# EAGLE board Middle Board - Nats (EAGLE 9.2.2)
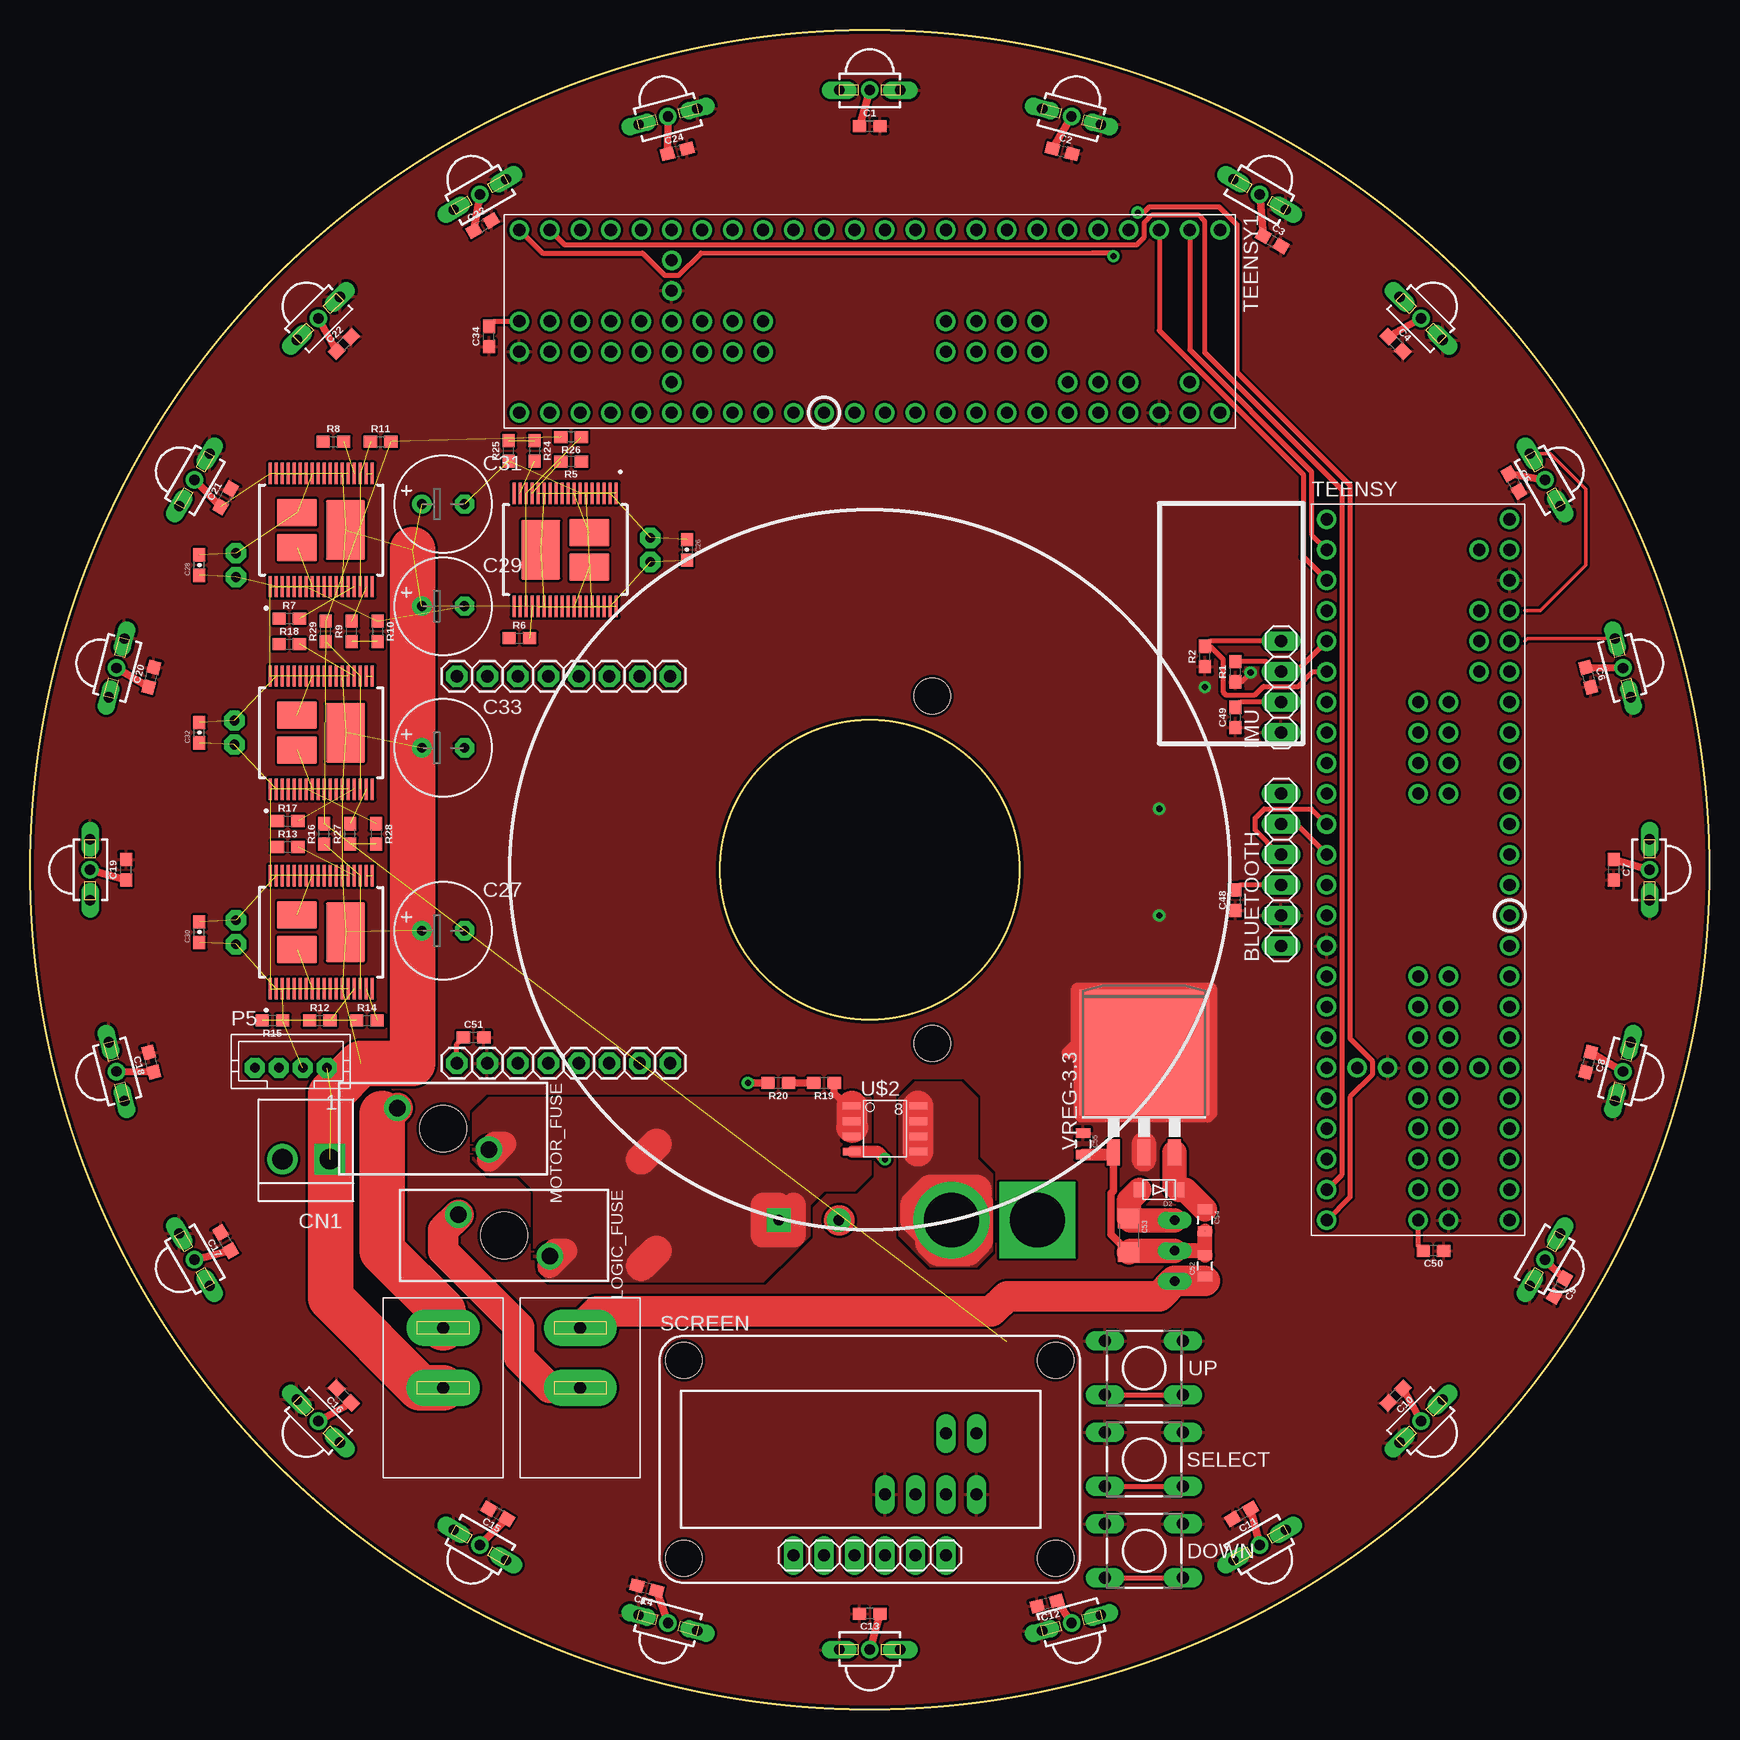
[diagram p0: board, top side]
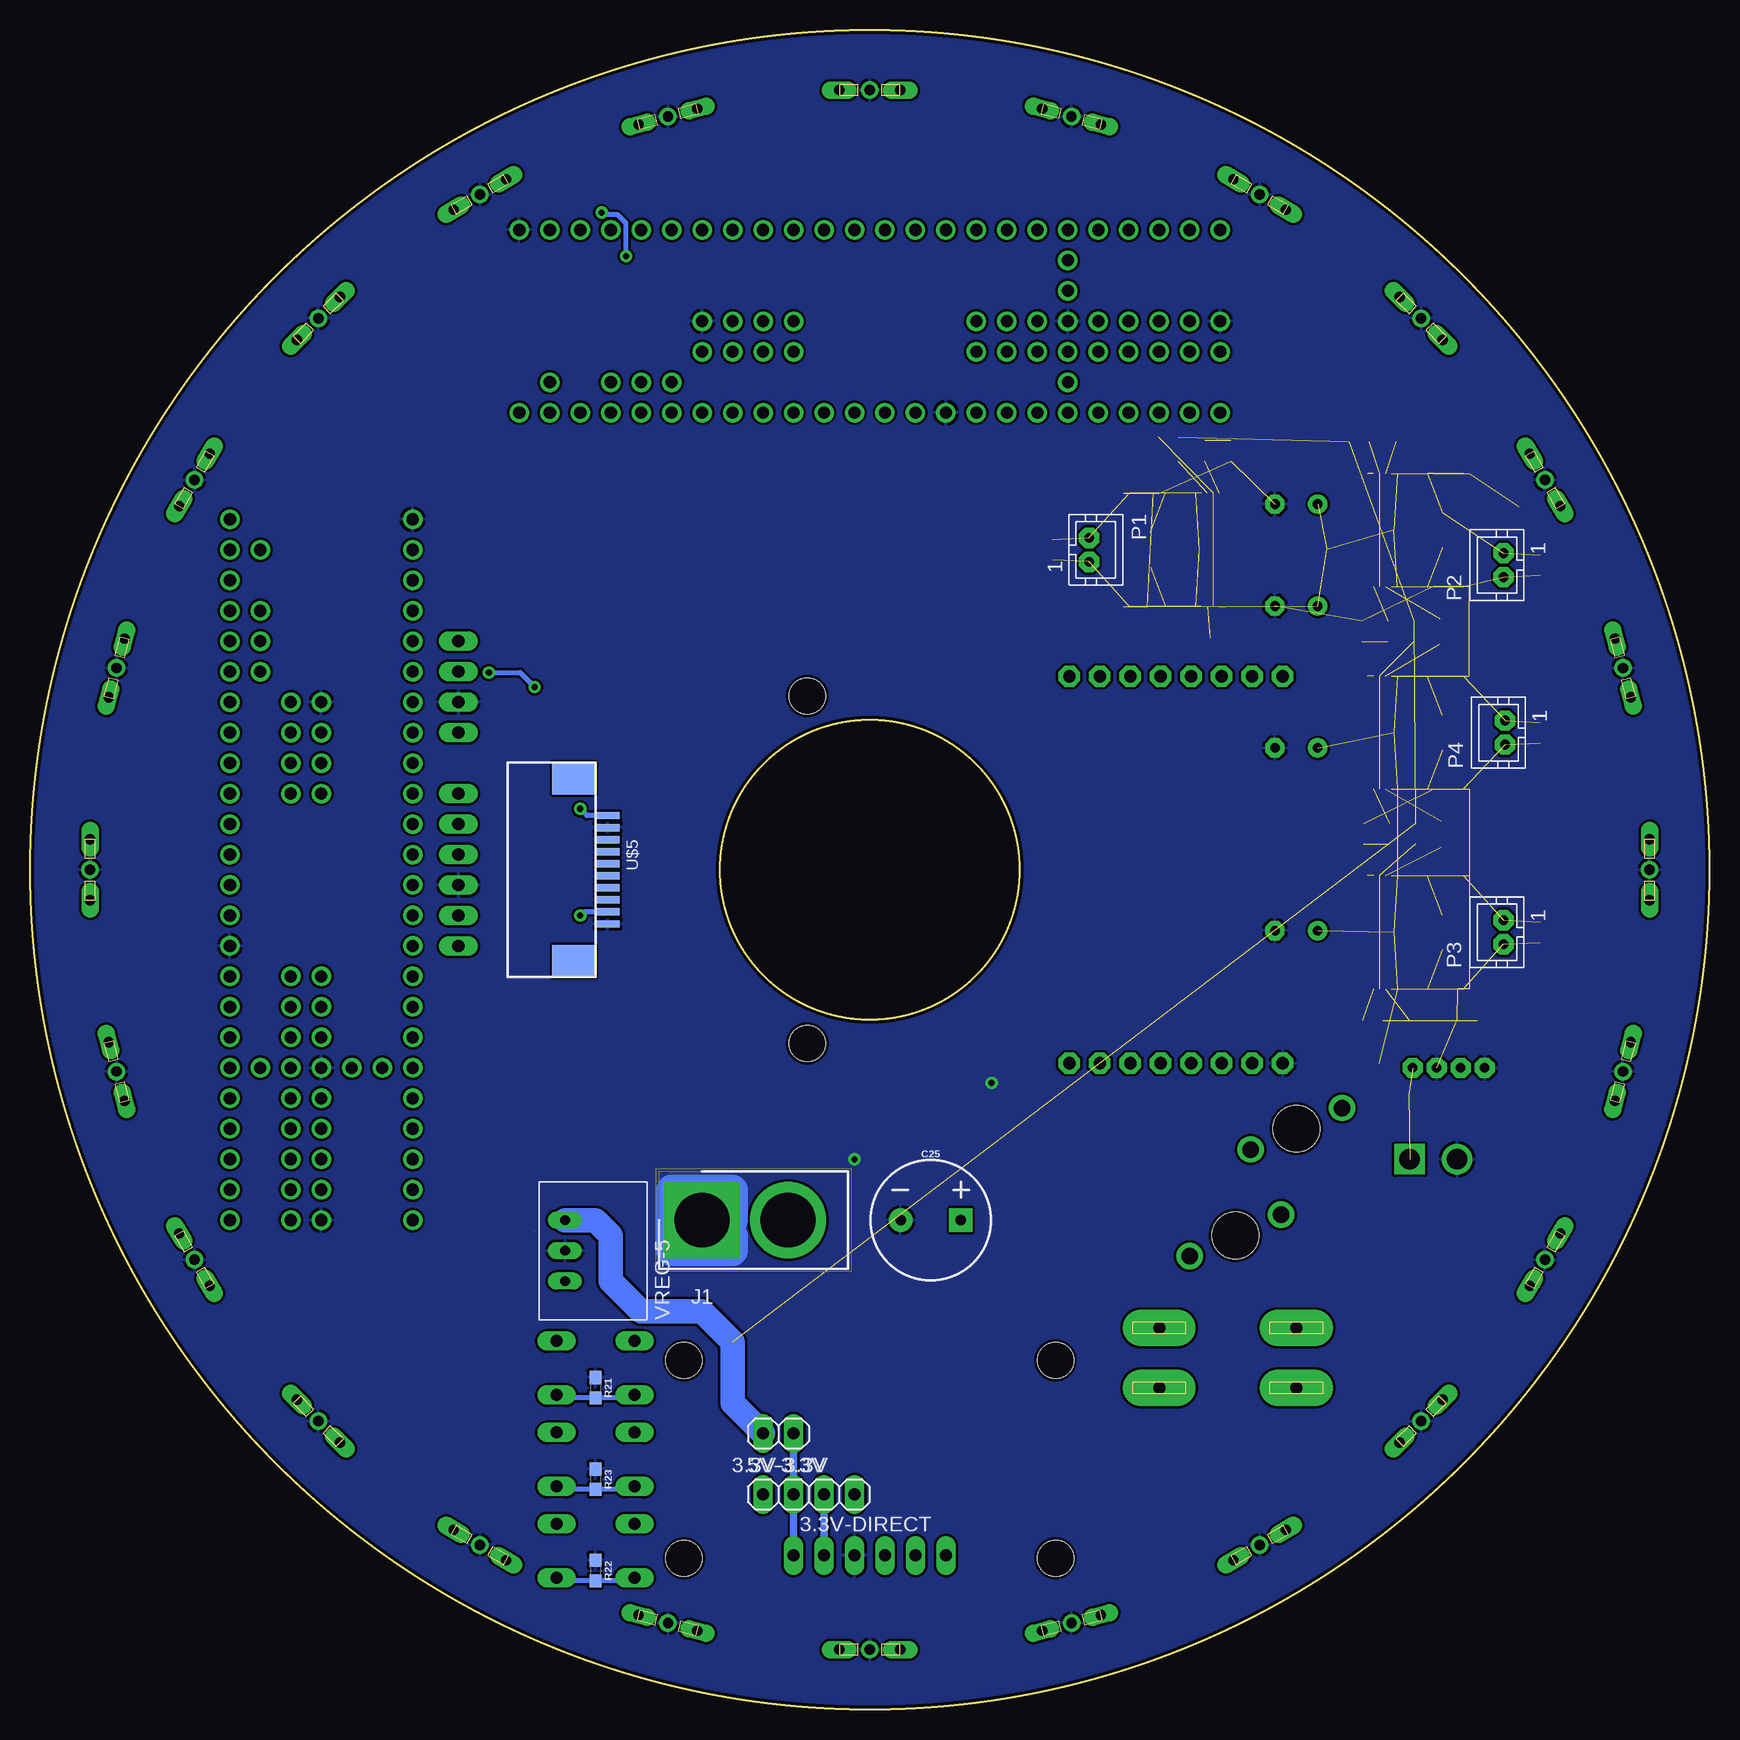
[diagram p1: board, bottom side, seen from below]

Size 140 x 140 mm. Coordinates in mm from the lower left corner, seen from the top.
Outline: circle at 70,70 radius 70
Outline: circle at 70,70 radius 12.5
Copper layers (1*16): Top 0.035mm / dielectric 1.5mm / Bottom 0.035mm
Design rules "SparkFun": minimum track width 8mil, minimum drill 20mil, track to track 8mil, track to pad 8mil, pad to pad 8mil, via to via 8mil, smd to smd 8mil, copper to edge 10mil, drill to drill 8mil, minimum pad ring 12mil, minimum via ring 10mil, stop-mask expansion 4mil, vias tented up to drill 25mil, thermal gap 10mil
Net classes: 0 default: width 0.305 mm, clearance 0.152 mm
Holes 3 mm at 75.21,55.52 75.21,84.48 54.51,29.11 85.49,29.11 85.49,12.6 54.51,12.6

## Footprints (pad centres in the part's own frame; a part is rotated, then mirrored left to right if it is on the bottom)
1X02 = drill 1.016 long: 1 -1.27,0; 2 1.27,0
1X06 = drill 1.016 long: 1 -6.35,0; 2 -3.81,0; 3 -1.27,0; 4 1.27,0; 5 3.81,0; 6 6.35,0
0603 = smd 1.1 x 1: 1 -0.85,0; 2 0.85,0
CPOL-RADIAL-5MM-10MM = drill 0.9 pad 1.93 square: + 2.5,0 | drill 0.9 pad 1.93: - -2.5,0
SPARKFUN-CAPACITORS_0603-CAP = smd 1.1 x 1: 1 -0.85,0; 2 0.85,0
E3,5-8 = drill 0.813 pad 1.6: + -1.778,0 | drill 0.813 pad 1.6 octagon: - 1.778,0
SPARKFUN-CAPACITORS_0805 = smd 0.8 x 1.2: 1 -0.9,0; 2 0.9,0
SPARKFUN-CAPACITORS_1206 = smd 1.6 x 1.8: 1 -1.4,0; 2 1.4,0
B2P-VH = drill 1.7 square: 1 -1.98,0 | drill 1.7: 2 1.98,0
ADAFRUIT_SOD-123FL = smd 0.91 x 1.22: A 1.637,0; C -1.637,0
DTS-6 = drill 1 long: 1 -3.25,2.25; 2 3.25,2.25; 3 -3.25,-2.25; 4 3.25,-2.25
1X04 = drill 1.016 long: 1 -3.81,0; 2 -1.27,0; 3 1.27,0; 4 3.81,0
SHDR2W320P716_1X2_1574X813X158 = drill 4.572 pad 6.35 square: 1 0,0 | drill 4.572 pad 6.35: 2 7.163,0
SL-1538 = drill 1.37 pad 2.184: P$1 1.73,3.81; P$2 -1.73,-3.81 | hole 3.88: 0,0
SOP50P1030X247-36N = smd 1.79 x 0.35: 1 -4.715,4.25; 2 -4.715,3.75; 3 -4.715,3.25; 4 -4.715,2.75; 5 -4.715,2.25; 6 -4.715,1.75; 7 -4.715,1.25; 8 -4.715,0.75; 9 -4.715,0.25; 10 -4.715,-0.25; 11 -4.715,-0.75; 12 -4.715,-1.25; 13 -4.715,-1.75; 14 -4.715,-2.25; 15 -4.715,-2.75; 16 -4.715,-3.25; 17 -4.715,-3.75; 18 -4.715,-4.25; 19 4.715,-4.25; 20 4.715,-3.75; 21 4.715,-3.25; 22 4.715,-2.75; 23 4.715,-2.25; 24 4.715,-1.75; 25 4.715,-1.25; 26 4.715,-0.75; 27 4.715,-0.25; 28 4.715,0.25; 29 4.715,0.75; 30 4.715,1.25; 31 4.715,1.75; 32 4.715,2.25; 33 4.715,2.75; 34 4.715,3.25; 35 4.715,3.75; 36 4.715,4.25 | smd 4.95 x 3.25: SLUG1 0,-2.025 | smd 2.286 x 3.302: SLUG2 -1.45,2.025; SLUG3 1.45,2.025
OPENMV3 = drill 1.016 pad 1.778 octagon: 11 1.651,19.304; 12 1.651,16.764; 13 1.651,14.224; 14 1.651,11.684; 15 1.651,9.144; 16 1.651,6.604; 17 1.651,4.064; 18 1.651,1.524; 21 33.909,19.304; 22 33.909,16.764; 23 33.909,14.224; 24 33.909,11.684; 25 33.909,9.144; 26 33.909,6.604; 27 33.909,4.064; 28 33.909,1.524
JST-PH2 = drill 0.813 pad 1.676 octagon: 1 1,0; 2 -1,0
JST-PH4 = drill 0.813 pad 1.676 octagon: 1 3,0; 2 1,0; 3 -1,0; 4 -3,0
TEENSY-3.5 = drill 1.016: 0 -7.62,26.67; 1 -7.62,24.13; 2 -7.62,21.59; 3 -7.62,19.05; 3.3V -7.62,-6.35; 3.3V-1 7.62,24.13; 3.3V-2 2.54,-29.21; 3.3V-3 -2.54,-16.51; 4 -7.62,16.51; 5 -7.62,13.97; 6 -7.62,11.43; 7 -7.62,8.89; 8 -7.62,6.35; 9 -7.62,3.81; 10 -7.62,1.27; 11 -7.62,-1.27; 12 -7.62,-3.81; 13 7.62,-3.81; 14 7.62,-1.27; 15 7.62,1.27; 16 7.62,3.81; 17 7.62,6.35; 18 7.62,8.89; 19 7.62,11.43; 20 7.62,13.97; 21 7.62,16.51; 22 7.62,19.05; 23 7.62,21.59; 24 -7.62,-8.89; 25 -7.62,-11.43; 26 -7.62,-13.97; 27 -7.62,-16.51; 28 -7.62,-19.05; 29 -7.62,-21.59; 30 -7.62,-24.13; 31 -7.62,-26.67; 32 -7.62,-29.21; 33 7.62,-29.21; 34 7.62,-26.67; 35 7.62,-24.13; 36 7.62,-21.59; 37 7.62,-19.05; 38 7.62,-16.51; 39 7.62,-13.97; 40 0,-8.89; 41 0,-11.43; 42 0,-13.97; 43 0,-19.05; 44 0,-21.59; 45 0,-24.13; 46 0,-26.67; 47 2.54,-26.67; 48 2.54,-24.13; 49 2.54,-21.59; 50 2.54,-19.05; 51 2.54,-13.97; 52 2.54,-11.43; 53 2.54,-8.89; 54 2.54,6.35; 55 2.54,8.89; 56 2.54,11.43; 57 2.54,13.97; A10 5.08,19.05; A11 5.08,16.51; AGND 7.62,26.67; AREF 5.08,21.59; DA0 7.62,-11.43; DA1 7.62,-8.89; DC 0,8.89; DD 0,6.35; DE 0,11.43; GND -7.62,29.21; GND-1 7.62,-6.35; GND-2 0,-29.21; GND-3 0,-16.51; GND-4 0,13.97; PRGRM 2.54,-16.51; RESET 5.08,-16.51; VBAT -5.08,-16.51; VIN 7.62,29.21; VUSB 5.08,26.67
MINICAST = drill 0.85 long: 1 0,2.54; 3 0,-2.54 | drill 0.85: 2 0,0
SWITCH = drill 1 pad 3.048 long: P$1 0,0; P$2 0,-5
SO-8 = smd 1.524 x 0.61: 1 -2.743,1.905; 2 -2.743,0.635; 3 -2.743,-0.635; 4 -2.743,-1.905; 5 2.743,-1.905; 6 2.743,-0.635; 7 2.743,0.635; 8 2.743,1.905
FPC10 = smd 0.61 x 2.007: 1 -4.515,1.003; 2 -3.512,1.003; 3 -2.508,1.003; 4 -1.505,1.003; 5 -0.502,1.003; 6 0.502,1.003; 7 1.505,1.003; 8 2.508,1.003; 9 3.512,1.003; 10 4.515,1.003 | smd 2.667 x 3.607: N/C-1 -7.62,-1.803; N/C-2 7.62,-1.803
LINEAR_TO263-3 = smd 1.067 x 2.159: 1 -2.54,-5.791; 2 0,-5.791; 3 2.54,-5.791 | smd 10.8 x 10.41: TAB 0,2.54
V78-2000-SWITCHING-REGULATOR_V78-2000 = drill 0.8 long: 1 -2.54,0; 2 0,0; 3 2.54,0

## Placement (x,y rotation side)
3.3V-3.3V  [1X02]  77.62,17.93 0 bottom
3.3V-DIRECT  [1X02]  72.54,17.93 180 bottom
5V-3.3V  [1X02]  77.62,23.01 0 bottom
BLUETOOTH  [1X06]  104.29,70 90 top
C1  0.1uF  [0603]  70,132 0 top
C2  0.1uF  [0603]  86.05,129.89 345 top
C3  0.1uF  [0603]  103.54,122.42 330 top
C4  0.1uF  [0603]  113.84,113.84 315 top
C5  0.1uF  [0603]  123.69,102.27 300 top
C6  0.1uF  [0603]  129.89,86.05 285 top
C7  0.1uF  [0603]  132,70 270 top
C8  0.1uF  [0603]  129.89,53.95 255 top
C9  0.1uF  [0603]  127.5,35.19 240 top
C10  0.1uF  [0603]  113.84,26.16 225 top
C11  0.1uF  [0603]  101,16.31 210 top
C12  0.1uF  [0603]  84.78,8.84 195 top
C13  0.1uF  [0603]  70,8 180 top
C14  0.1uF  [0603]  51.41,10.11 165 top
C15  0.1uF  [0603]  39,16.31 150 top
C16  0.1uF  [0603]  26.16,26.16 135 top
C17  0.1uF  [0603]  16.31,39 120 top
C18  0.1uF  [0603]  10.11,53.95 105 top
C19  0.1uF  [0603]  8,70 90 top
C20  0.1uF  [0603]  10.11,86.05 75 top
C21  0.1uF  [0603]  16.31,101 60 top
C22  0.1uF  [0603]  26.16,113.84 45 top
C23  0.1uF  [0603]  37.73,123.69 30 top
C24  0.1uF  [0603]  53.95,129.89 15 top
C25  1mF  [CPOL-RADIAL-5MM-10MM]  64.92,40.79 0 bottom
C26  0.1UF_CAPACITOR_SMD  [SPARKFUN-CAPACITORS_0603-CAP]  54.76,96.67 270 top
C27  470uF  [E3,5-8]  34.44,64.92 0 top
C28  0.1UF_CAPACITOR_SMD  [SPARKFUN-CAPACITORS_0603-CAP]  14.12,95.4 90 top
C29  470uF  [E3,5-8]  34.44,91.97 0 top
C30  0.1UF_CAPACITOR_SMD  [SPARKFUN-CAPACITORS_0603-CAP]  14.12,64.79 90 top
C31  470uF  [E3,5-8]  34.44,100.48 0 top
C32  0.1UF_CAPACITOR_SMD  [SPARKFUN-CAPACITORS_0603-CAP]  14.12,81.43 90 top
C33  470uF  [E3,5-8]  34.44,80.16 0 top
C34  0.1uF  [0603]  38.25,114.45 90 top
C48  0.1uF  [0603]  100.48,67.46 90 top
C49  0.1uF  [0603]  100.48,82.7 90 top
C50  0.1uF  [0603]  116.99,38.25 180 top
C51  0.1uF  [0603]  36.98,56.03 0 top
C52  10uF  [SPARKFUN-CAPACITORS_0805]  97.94,36.98 90 top
C53  22uF  [SPARKFUN-CAPACITORS_1206]  91.59,39.52 270 top
C54  10uF  [SPARKFUN-CAPACITORS_0805]  97.94,40.79 270 top
C55  10uF  [SPARKFUN-CAPACITORS_0805]  87.78,47.14 270 top
CN1  [B2P-VH]  23.01,45.87 180 top
D2  [ADAFRUIT_SOD-123FL]  94.13,43.33 180 top
DOWN  DTS-6  [DTS-6]  92.86,13.23 0 top
IMU  [1X04]  104.29,85.24 90 top
J1  PRT-10474  [SHDR2W320P716_1X2_1574X813X158]  83.97,40.79 0 bottom
LOGIC_FUSE  FUSE_MINI_BLADE  [SL-1538]  39.52,39.52 270 top
MOTOR_1  [SOP50P1030X247-36N]  24.28,98.32 90 top
MOTOR_2  [SOP50P1030X247-36N]  24.28,64.79 90 top
MOTOR_3  [SOP50P1030X247-36N]  24.28,81.43 90 top
MOTOR_5  [SOP50P1030X247-36N]  44.6,96.67 270 top
MOTOR_FUSE  FUSE_MINI_BLADE  [SL-1538]  34.44,48.41 270 top
OPEN-MV  OPENMV3  [OPENMV3]  34.06,87.78 270 top
P1  [JST-PH2]  51.71,96.67 270 bottom
P2  [JST-PH2]  17.17,95.4 90 bottom
P3  [JST-PH2]  17.17,64.79 90 bottom
P4  [JST-PH2]  17.04,81.43 90 bottom
P5  [JST-PH4]  21.74,53.49 0 top
R1  10k  [0603]  100.48,86.51 90 top
R2  10k  [0603]  97.94,87.78 90 top
R5  1k  [0603]  45.11,104.04 180 top
R6  1k  [0603]  40.79,89.3 0 top
R7  1k  [0603]  21.61,90.95 0 top
R8  1k  [0603]  25.3,105.69 0 top
R9  1k  [0603]  26.82,89.88 90 top
R10  1k  [0603]  28.98,89.88 270 top
R11  4.7k  [0603]  29.23,105.69 0 top
R12  1k  [0603]  24.15,57.43 0 top
R13  1k  [0603]  21.49,71.91 0 top
R14  1k  [0603]  28.09,57.43 0 top
R15  1k  [0603]  20.22,57.43 180 top
R16  4.7k  [0603]  24.53,72.98 90 top
R17  1k  [0603]  21.49,74.06 0 top
R18  1k  [0603]  21.61,88.8 0 top
R19  35.7kOhm  [0603]  66.19,52.22 180 top
R20  10.2kOhm  [0603]  62.38,52.22 180 top
R21  10k  [0603]  92.86,26.82 270 bottom
R22  10k  [0603]  92.86,11.58 270 bottom
R23  10k  [0603]  92.86,19.2 270 bottom
R24  1k  [0603]  42.06,104.92 270 top
R25  1k  [0603]  39.9,104.92 90 top
R26  4.7k  [0603]  45.11,106.07 180 top
R27  1k  [0603]  26.69,72.98 90 top
R28  1k  [0603]  28.85,72.98 270 top
R29  4.7k  [0603]  24.66,89.88 90 top
SCREEN  [1X06]  70,12.85 0 top
SELECT  DTS-6  [DTS-6]  92.86,20.85 0 top
TEENSY  TEENSY-3.5  [TEENSY-3.5]  115.72,70 0 top
TEENSY1  TEENSY-3.5  [TEENSY-3.5]  70,115.72 270 top
TSSP1  TSSP58038  [MINICAST]  70,135 270 top
TSSP2  TSSP58038  [MINICAST]  86.82,132.79 255 top
TSSP3  TSSP58038  [MINICAST]  102.5,126.29 240 top
TSSP4  TSSP58038  [MINICAST]  115.96,115.96 225 top
TSSP5  TSSP58038  [MINICAST]  126.29,102.5 210 top
TSSP6  TSSP58038  [MINICAST]  132.79,86.82 195 top
TSSP7  TSSP58038  [MINICAST]  135,70 180 top
TSSP8  TSSP58038  [MINICAST]  132.79,53.18 165 top
TSSP9  TSSP58038  [MINICAST]  126.29,37.5 150 top
TSSP10  TSSP58038  [MINICAST]  115.96,24.04 135 top
TSSP11  TSSP58038  [MINICAST]  102.5,13.71 120 top
TSSP12  TSSP58038  [MINICAST]  86.82,7.21 105 top
TSSP13  TSSP58038  [MINICAST]  70,5 90 top
TSSP14  TSSP58038  [MINICAST]  53.18,7.21 75 top
TSSP15  TSSP58038  [MINICAST]  37.5,13.71 60 top
TSSP16  TSSP58038  [MINICAST]  24.04,24.04 45 top
TSSP17  TSSP58038  [MINICAST]  13.71,37.5 30 top
TSSP18  TSSP58038  [MINICAST]  7.21,53.18 15 top
TSSP19  TSSP58038  [MINICAST]  5,70 0 top
TSSP20  TSSP58038  [MINICAST]  7.21,86.82 345 top
TSSP21  TSSP58038  [MINICAST]  13.71,102.5 330 top
TSSP22  TSSP58038  [MINICAST]  24.04,115.96 315 top
TSSP23  TSSP58038  [MINICAST]  37.5,126.29 300 top
TSSP24  TSSP58038  [MINICAST]  53.18,132.79 285 top
U$1  MINI_SWITCH  [SWITCH]  45.87,26.82 180 top
U$2  SI4143DY  [SO-8]  71.27,48.41 0 top
U$3  MINI_SWITCH  [SWITCH]  34.44,26.82 180 top
U$5  FPC10  [FPC10]  92.86,70 270 bottom
UP  DTS-6  [DTS-6]  92.86,28.47 0 top
VREG-3.3  LINEAR_LM340S-05  [LINEAR_TO263-3]  92.86,52.22 0 top
VREG-5  V78-2000-SWITCHING-REGULATOR_V78-2000  [V78-2000-SWITCHING-REGULATOR_V78-2000]  95.4,38.25 90 bottom

## Library data of the parts
3.3V-3.3V 3.3V-DIRECT 5V-3.3V BLUETOOTH IMU SCREEN = PinHead+
C1-C24 C34 C48-C51 = SparkFun-Capacitors; PROD_ID: CAP-00810
C25 = SparkFun-Capacitors; PROD_ID: CAP-09538
C26 C28 C30 C32 C52-C55 = Capacitors
C27 C29 C31 C33 = rcl
CN1 = JST-VH
D2 VREG-3.3 VREG-5 = Main
DOWN SELECT UP = switch-tact
J1 = XT60; ARROW_PART_NUMBER: PRT-10474; DESCRIPTION: Soldering Workstation Equipment XT60 Connectors Male/Female Pair; HEIGHT: 15.875mm; MANUFACTURER_NAME: SparkFun; MANUFACTURER_PART_NUMBER: PRT-10474
LOGIC_FUSE MOTOR_FUSE = Fuse_Holder
MOTOR_1-MOTOR_3 MOTOR_5 = VNH5050ATR-E; A1_MAX: 0.32; A1_MIN: 0.23; A1_NOM: 0.275; A_MAX: 2.47; A_MIN: 2.15; A_NOM: 2.31; B_MAX: 0.36; B_MIN: 0.18; B_NOM: 0.27; D2_MAX: 0.0; D2_MIN: None; D2_NOM: None; D_MAX: 10.5; D_MIN: 10.1; D_NOM: 10.3; E1_MAX: 7.6; E1_MIN: 7.4; E1_NOM: 7.5; E2_MAX: 0.0; E2_MIN: None; E2_NOM: None; ENOM: 0.5; E_MAX: 10.5; E_MIN: 10.1; E_NOM: 10.3; L_MAX: 1.0; L_MIN: 0.6; L_NOM: 0.8; MANUFACTURER: STMicroelectronics; PIN_COUNT: 36.0; SNAPEDA_PACKAGE_ID: 23434
OPEN-MV = OpenMV
P1-P5 = jst-ph
R1 R2 R21-R23 = SparkFun-Resistors; PROD_ID: RES-00824
R5-R10 R12-R15 R17 R18 R24 R25 R27 R28 = SparkFun-Resistors; PROD_ID: RES-07856
R11 R16 R26 R29 = SparkFun-Resistors; PROD_ID: RES-07857
R19 R20 = SparkFun-Resistors; PROD_ID: RES-09737
TEENSY TEENSY1 = teensy-3.5
TSSP1-TSSP24 = IR Receivers
U$1 U$3 = Mini Switch
U$2 = MOSFET
U$5 = FFC

## Nets
3.3V: 3.3V-3.3V.1 3.3V-DIRECT.1 BLUETOOTH.2 C1.2 C2.2 C3.2 C4.2 C5.2 C6.2 C7.2 C8.2 C9.2 C10.2 C11.2 C12.2 C13.2 C14.2 C15.2 C16.2 C17.2 C18.2 C19.2 C20.2 C21.2 C22.2 C23.2 C24.2 C34.1 C48.1 C49.1 C50.1 C51.2 C55.1 DOWN.1 DOWN.2 IMU.1 OPEN-MV.27 R1.1 R2.1 SELECT.1 SELECT.2 TEENSY1.3.3V-1 TEENSY1.3.3V-2 TEENSY1.3.3V-3 TEENSY.3.3V TEENSY.3.3V-1 TEENSY.3.3V-2 TEENSY.3.3V-3 TSSP1.1 TSSP2.1 TSSP3.1 TSSP4.1 TSSP5.1 TSSP6.1 TSSP7.1 TSSP8.1 TSSP9.1 TSSP10.1 TSSP11.1 TSSP12.1 TSSP13.1 TSSP14.1 TSSP15.1 TSSP16.1 TSSP17.1 TSSP18.1 TSSP19.1 TSSP20.1 TSSP21.1 TSSP22.1 TSSP23.1 TSSP24.1 U$5.1 U$5.9 UP.1 UP.2 VREG-3.3.2 VREG-3.3.TAB
5V: 5V-3.3V.1 C53.1 D2.A R11.2 R16.2 R26.2 R29.2 VREG-5.3
12V: C27.+ C29.+ C31.+ C33.+ CN1.1 MOTOR_1.13 MOTOR_1.24 MOTOR_1.SLUG1 MOTOR_2.13 MOTOR_2.24 MOTOR_2.SLUG1 MOTOR_3.13 MOTOR_3.24 MOTOR_3.SLUG1 MOTOR_5.13 MOTOR_5.24 MOTOR_5.SLUG1 P5.1 U$3.P$1
BATTERY-VOLTAGE(ANALOG): R19.2 R20.1
BDOWN: DOWN.3 DOWN.4 R22.2
BSELECT: R23.2 SELECT.3 SELECT.4
BUP: R21.2 UP.3 UP.4
COMS-CS: TEENSY1.31 TEENSY.31
COMS-MISO: TEENSY1.1 TEENSY.1
COMS-MOSI: TEENSY1.0 TEENSY.0
COMS-SCK: TEENSY1.32 TEENSY.32
GND: BLUETOOTH.3 C1.1 C2.1 C3.1 C4.1 C5.1 C6.1 C7.1 C8.1 C9.1 C10.1 C11.1 C12.1 C13.1 C14.1 C15.1 C16.1 C17.1 C18.1 C19.1 C20.1 C21.1 C22.1 C23.1 C24.1 C25.- C27.- C29.- C31.- C33.- C34.2 C48.2 C49.2 C50.2 C51.1 C52.2 C53.2 C54.2 C55.2 CN1.2 IMU.2 J1.1 MOTOR_1.1 MOTOR_1.3 MOTOR_1.4 MOTOR_1.5 MOTOR_1.6 MOTOR_1.7 MOTOR_1.30 MOTOR_1.31 MOTOR_1.32 MOTOR_1.33 MOTOR_1.34 MOTOR_1.36 MOTOR_2.1 MOTOR_2.3 MOTOR_2.4 MOTOR_2.5 MOTOR_2.6 MOTOR_2.7 MOTOR_2.30 MOTOR_2.31 MOTOR_2.32 MOTOR_2.33 MOTOR_2.34 MOTOR_2.36 MOTOR_3.1 MOTOR_3.3 MOTOR_3.4 MOTOR_3.5 MOTOR_3.6 MOTOR_3.7 MOTOR_3.30 MOTOR_3.31 MOTOR_3.32 MOTOR_3.33 MOTOR_3.34 MOTOR_3.36 MOTOR_5.1 MOTOR_5.3 MOTOR_5.4 MOTOR_5.5 MOTOR_5.6 MOTOR_5.7 MOTOR_5.30 MOTOR_5.31 MOTOR_5.32 MOTOR_5.33 MOTOR_5.34 MOTOR_5.36 OPEN-MV.28 P5.2 P5.4 R10.1 R15.1 R20.2 R21.1 R22.1 R23.1 R25.1 R28.1 SCREEN.4 TEENSY1.GND TEENSY1.GND-1 TEENSY1.GND-2 TEENSY1.GND-3 TEENSY1.GND-4 TEENSY.GND TEENSY.GND-1 TEENSY.GND-2 TEENSY.GND-3 TEENSY.GND-4 TSSP1.2 TSSP2.2 TSSP3.2 TSSP4.2 TSSP5.2 TSSP6.2 TSSP7.2 TSSP8.2 TSSP9.2 TSSP10.2 TSSP11.2 TSSP12.2 TSSP13.2 TSSP14.2 TSSP15.2 TSSP16.2 TSSP17.2 TSSP18.2 TSSP19.2 TSSP20.2 TSSP21.2 TSSP22.2 TSSP23.2 TSSP24.2 U$2.4 U$5.2 U$5.10 VREG-3.3.1 VREG-5.2
KICKER-SIG: P5.3
LS-CONTROL1: U$5.8
LS-CONTROL2: U$5.7
LS-CONTROL3: U$5.6
LS-CONTROL4: U$5.5
LS-CONTROL5: U$5.4
LS-OUTPUT: U$5.3
MOTOR-BL(ENA): R17.1
MOTOR-BL(ENB): R18.1
MOTOR-BL(PWM): R27.1 R28.2
MOTOR-BR(ENA): R12.1
MOTOR-BR(ENB): R13.1
MOTOR-BR(PWM): R14.1 R15.2
MOTOR-FL(ENA): R7.1
MOTOR-FL(ENB): R8.1
MOTOR-FL(PWM): R9.1 R10.2
MOTOR-FR(ENA): R5.1
MOTOR-FR(ENB): R6.1
MOTOR-FR(PWM): R24.1 R25.2
N$1: J1.2 U$2.5 U$2.6 U$2.7 U$2.8
N$2: MOTOR_FUSE.P$2 U$3.P$2
N$3: C25.+ LOGIC_FUSE.P$1 MOTOR_FUSE.P$1 R19.1 U$2.1 U$2.2 U$2.3
N$4: LOGIC_FUSE.P$2 U$1.P$1
N$5: MOTOR_1.15 R7.2
N$8: MOTOR_5.15 R5.2
N$9: MOTOR_5.17 R24.2
N$10: MOTOR_5.22 R6.2
N$11: C26.1 MOTOR_5.2 MOTOR_5.8 MOTOR_5.9 MOTOR_5.10 MOTOR_5.11 MOTOR_5.12 MOTOR_5.14 MOTOR_5.SLUG2 P1.2
N$12: MOTOR_1.22 R8.2
N$13: MOTOR_5.19 MOTOR_5.20
N$14: C26.2 MOTOR_5.23 MOTOR_5.25 MOTOR_5.26 MOTOR_5.27 MOTOR_5.28 MOTOR_5.29 MOTOR_5.35 MOTOR_5.SLUG3 P1.1
N$15: MOTOR_1.17 R9.2
N$16: MOTOR_1.19 MOTOR_1.20
N$17: C28.2 MOTOR_1.23 MOTOR_1.25 MOTOR_1.26 MOTOR_1.27 MOTOR_1.28 MOTOR_1.29 MOTOR_1.35 MOTOR_1.SLUG3 P2.1
N$18: C28.1 MOTOR_1.2 MOTOR_1.8 MOTOR_1.9 MOTOR_1.10 MOTOR_1.11 MOTOR_1.12 MOTOR_1.14 MOTOR_1.SLUG2 P2.2
N$19: MOTOR_1.16 MOTOR_1.21 R11.1
N$20: MOTOR_2.15 R12.2
N$21: MOTOR_2.22 R13.2
N$22: MOTOR_2.17 R14.2
N$23: MOTOR_2.19 MOTOR_2.20
N$24: C30.2 MOTOR_2.23 MOTOR_2.25 MOTOR_2.26 MOTOR_2.27 MOTOR_2.28 MOTOR_2.29 MOTOR_2.35 MOTOR_2.SLUG3 P3.1
N$25: C30.1 MOTOR_2.2 MOTOR_2.8 MOTOR_2.9 MOTOR_2.10 MOTOR_2.11 MOTOR_2.12 MOTOR_2.14 MOTOR_2.SLUG2 P3.2
N$26: MOTOR_2.16 MOTOR_2.21 R16.1
N$27: MOTOR_3.15 R17.2
N$28: MOTOR_3.22 R18.2
N$29: MOTOR_3.17 R27.2
N$30: MOTOR_3.19 MOTOR_3.20
N$31: C32.2 MOTOR_3.23 MOTOR_3.25 MOTOR_3.26 MOTOR_3.27 MOTOR_3.28 MOTOR_3.29 MOTOR_3.35 MOTOR_3.SLUG3 P4.1
N$32: C32.1 MOTOR_3.2 MOTOR_3.8 MOTOR_3.9 MOTOR_3.10 MOTOR_3.11 MOTOR_3.12 MOTOR_3.14 MOTOR_3.SLUG2 P4.2
N$33: MOTOR_5.16 MOTOR_5.21 R26.1
N$34: MOTOR_3.16 MOTOR_3.21 R29.1
N$35: 3.3V-DIRECT.2 SCREEN.5
N$37: 3.3V-3.3V.2 5V-3.3V.2 SCREEN.6
N$38: TEENSY1.15
N$40: C52.1 U$1.P$2 VREG-5.1
N$41: C54.1 D2.C VREG-3.3.3
RX(BLUETOOTH): BLUETOOTH.5 TEENSY.10
RX(CAM): OPEN-MV.16
SCL(IMU): IMU.3 R1.2 TEENSY.3
SCREEN(SCL): SCREEN.2
SCREEN(SDA): SCREEN.1
SDA(IMU): IMU.4 R2.2 TEENSY.4
TSSP1: TSSP1.3
TSSP2: TSSP2.3
TSSP3: TSSP3.3
TSSP4: TSSP4.3
TSSP5: TSSP5.3
TSSP6: TSSP6.3
TSSP7: TSSP7.3
TSSP8: TSSP8.3
TSSP9: TSSP9.3
TSSP10: TSSP10.3
TSSP11: TSSP11.3
TSSP12: TSSP12.3
TSSP13: TSSP13.3
TSSP14: TSSP14.3
TSSP15: TSSP15.3
TSSP16: TSSP16.3
TSSP17: TSSP17.3
TSSP18: TSSP18.3
TSSP19: TSSP19.3
TSSP20: TSSP20.3
TSSP21: TSSP21.3
TSSP22: TSSP22.3
TSSP23: TSSP23.3
TSSP24: TSSP24.3
TX(BLUETOOTH): BLUETOOTH.4 TEENSY.9
TX(CAM): OPEN-MV.15

## Tracks (layer width: path | path; a pad name or v marks a point on that pad's centre or on a via)
3.3V  (via drill 0.51)
  Top 0.406: R1.1 100.96,85.66 v101.75,86.45
  Top 1.016: VREG-3.3.TAB 86.51,54.76 87.27,55.52 87.27,60.09 98.45,60.09 98.45,49.68 98.19,49.43 87.65,49.43 87.53,49.55 87.53,54.12 87.4,54.25
  Top 2.032: 92.86,47.14 VREG-3.3.2 92.86,45.87
  Bottom 0.406: U$5.9 93.83,66.49 v94.13,66.19 | U$5.1 93.56,74.52 v94.13,75.08 | v101.75,86.45 99.15,86.45 v97.94,85.24
  pour Top (rank 2): 70,141.12 -1.12,141.12 -1.12,68.73 -1.12,-1.12 70,-1.12 141.12,-1.12 141.12,73.81 141.12,141.12
5V  (4 unrouted)
  Top 2.032: VREG-5.3 91.72,40.79 C53.1 91.59,42.43 D2.A
  Bottom 2.032: VREG-5.3 92.86,40.79 91.59,39.52 91.59,35.71 89.05,33.17 83.97,33.17 81.43,30.63 81.43,25.55 5V-3.3V.1
12V  (18 unrouted)
  Top 3.81: U$3.P$1 32.53,26.82 25.04,34.31 25.04,51.33 27.58,53.87 31.9,53.87 31.9,96.67
BATTERY-VOLTAGE(ANALOG)
  Top 0.61: R19.2 R20.1
BDOWN
  Top 0.406: DOWN.3 DOWN.4
  Bottom 0.406: DOWN.3 89.86,10.73 R22.2 95.86,10.73 DOWN.4
BSELECT
  Top 0.406: SELECT.3 SELECT.4
  Bottom 0.406: SELECT.3 89.86,18.35 R23.2 95.86,18.35 SELECT.4
BUP
  Top 0.406: UP.3 UP.4
  Bottom 0.406: UP.3 89.86,25.97 R21.2 95.86,25.97 UP.4
COMS-CS
  Top 0.406: TEENSY.31 109.34,44.58 109.34,101.7 97.91,113.13 97.91,124.06 97.39,124.59 93.54,124.59 92.89,123.93 92.89,122.73 92.25,122.09 44.58,122.09 TEENSY1.31
COMS-MISO
  Top 0.406: TEENSY1.1 94.13,114.96 106.14,102.94 106.14,96.09 TEENSY.1
COMS-MOSI
  Top 0.406: TEENSY1.0 96.67,113.34 106.83,103.17 106.83,97.94 TEENSY.0
COMS-SCK  (via drill 0.51)
  Top 0.406: TEENSY.32 110.03,42.72 110.03,51.05 111.88,52.9 111.88,54.08 110.03,55.93 110.03,102.06 100.61,111.49 100.61,123.78 99.11,125.27 93.31,125.27 92.82,124.79 v92.34,124.79 | TEENSY1.32 42.72,121.41 51.05,121.41 52.9,119.56 54.08,119.56 55.93,121.41 88.54,121.44 90.04,121.44 v90.32,121.16
  Bottom 0.406: v90.32,121.16 90.32,123.91 91,124.59 92.14,124.59 v92.34,124.79
GND  (via drill 0.51)  (53 unrouted)
  Top 0.406: IMU.2 100.9,83.97 C49.2 | BLUETOOTH.3 100.9,68.73 C48.2 | OPEN-MV.28 35.58,55.48 C51.1 | C34.2 38.67,115.72 TEENSY1.GND-2 | C50.2 115.72,38.67 TEENSY.GND-2
  Top 0.61: VREG-3.3.1 90.32,43.24 90.12,43.04 90.12,39.59 C53.2 | C1.1 TSSP1.2 | C2.1 TSSP2.2 | C3.1 TSSP3.2 | C4.1 TSSP4.2 | C5.1 TSSP5.2 | C6.1 TSSP6.2 | C7.1 TSSP7.2 | C8.1 TSSP8.2 | C9.1 127.81,35.98 TSSP9.2 | C10.1 TSSP10.2 | C11.1 TSSP11.2 | C12.1 TSSP12.2 | C13.1 TSSP13.2 | C14.1 TSSP14.2 | C15.1 TSSP15.2 | C16.1 TSSP16.2 | C17.1 TSSP17.2 | C18.1 TSSP18.2 | C19.1 TSSP19.2 | C20.1 TSSP20.2 | C21.1 TSSP21.2 | C22.1 TSSP22.2 | C23.1 TSSP23.2 | C24.1 TSSP24.2 | R20.2 v59.84,52.22
  Top 1.016: U$2.4 70.64,46.5 v71.27,45.87 | VREG-3.3.1 90.13,46.24 C55.2
  Top 1.27: VREG-5.2 97.57,38.25 C52.2 C54.2
  Top 2.032: VREG-5.2 91.72,38.25 C53.2
  Top 2.54: C25.- 67.46,40.79
  Bottom 2.54: J1.1 81.43,40.79 81.43,43.33 86.51,43.33 86.51,38.25 81.43,38.25 81.43,39.52 83.97,39.52 83.97,42.06
  pour Bottom: 142.39,142.39 -2.39,142.39 -2.39,-2.39 142.39,-2.39
MOTOR-BL(PWM)  (1 unrouted)
MOTOR-BR(PWM)  (1 unrouted)
MOTOR-FL(PWM)  (1 unrouted)
MOTOR-FR(PWM)  (1 unrouted)
N$1
  Top 2.54: U$2.8 U$2.5 | J1.2 77.62,40.79 78.89,42.06 78.89,43.33 75.08,43.33 73.81,42.06 73.81,40.79 75.08,39.52 75.08,38.89 75.72,38.25 78.13,38.25 79.02,39.14 79.02,42.19 75.97,42.19 75.46,41.68 76.35,40.79 76.35,39.52
  pour Top: 72.54,50.95 72.54,39.52 75.08,36.98 78.89,36.98 80.16,38.25 80.16,43.33 80.16,44.6 78.89,45.87 78.89,50.95 77.62,52.22 73.81,52.22
N$2
  Top 2.54: MOTOR_FUSE.P$2 30.17,49.68 29.36,49.68
  Top 3.81: 29.36,49.68 29.36,38.25 34.44,33.17 U$3.P$2
N$3
  Top 0.61: R19.1 67.04,51.37 67.46,50.95
  Top 2.032: C25.+ 62.38,40.83 62.38,42.06 61.11,42.06 61.11,39.52 63.65,39.52 63.65,42.06 | MOTOR_FUSE.P$1 38.71,47.14 39.52,47.14 38.25,45.87 | LOGIC_FUSE.P$1 43.79,38.25 44.6,38.25 43.33,36.98
  Top 2.54: U$2.1 U$2.2 68.53,48.61 68.6,48.54 68.48,48.54 | 52.22,47.14 50.95,45.87 | 52.22,38.25 50.95,36.98
  pour Top: 70,50.95 38.25,50.95 36.98,49.68 36.98,45.87 38.25,44.6 40.79,44.6 42.06,43.33 42.06,36.98 43.33,35.71 61.11,35.71 63.65,38.25 64.92,39.52 64.92,42.06 66.19,43.33 68.73,43.33 70,44.6
N$4
  Top 2.54: LOGIC_FUSE.P$2 34.44,39.98 34.44,38.25 40.79,31.9 40.79,29.36 43.33,26.82 U$1.P$1
N$5  (1 unrouted)
N$8  (1 unrouted)
N$9  (1 unrouted)
N$10  (1 unrouted)
N$11  (9 unrouted)
N$12  (1 unrouted)
N$13  (1 unrouted)
N$14  (9 unrouted)
N$15  (1 unrouted)
N$16  (1 unrouted)
N$17  (9 unrouted)
N$18  (9 unrouted)
N$19  (2 unrouted)
N$20  (1 unrouted)
N$21  (1 unrouted)
N$22  (1 unrouted)
N$23  (1 unrouted)
N$24  (9 unrouted)
N$25  (9 unrouted)
N$26  (2 unrouted)
N$27  (1 unrouted)
N$28  (1 unrouted)
N$29  (1 unrouted)
N$30  (1 unrouted)
N$31  (9 unrouted)
N$32  (9 unrouted)
N$33  (2 unrouted)
N$34  (2 unrouted)
N$35
  Bottom 0.61: 3.3V-DIRECT.2 SCREEN.5
N$37
  Bottom 0.61: 5V-3.3V.2 3.3V-3.3V.2 SCREEN.6
N$40
  Top 1.27: 97.94,35.71 C52.1
  Top 2.54: U$1.P$2 47.22,33.17 80.16,33.17 81.43,34.44 94.13,34.44 VREG-5.1 97.94,35.71
N$41
  Top 2.032: C54.1 96.3,43.33 D2.C 95.4,43.7 VREG-3.3.3
RX(BLUETOOTH)
  Top 0.406: BLUETOOTH.5 105.56,73.81 TEENSY.10
SCL(IMU)
  Top 0.406: R1.2 103.02,87.36 103.87,86.51 IMU.3 105.56,86.51 TEENSY.3
SDA(IMU)
  Top 0.406: IMU.4 98.36,89.05 R2.2 98.36,88.63 99.45,87.54 99.45,84.81 99.69,84.58 102.1,84.58 102.82,85.29 105.73,85.29 106.95,86.51 TEENSY.4
TSSP5
  Top 0.305: TSSP5.3 126.74,104.7 129.69,101.75 129.69,95.4 125.88,91.59 124.61,91.59
TSSP6
  Top 0.305: TSSP6.3 124.84,89.28 124.61,89.05
TX(BLUETOOTH)
  Top 0.406: BLUETOOTH.4 104.16,71.27 102.13,73.3 102.13,74.32 102.89,75.08 106.83,75.08 TEENSY.9